# EAGLE board Board_file (EAGLE 9.7.0)
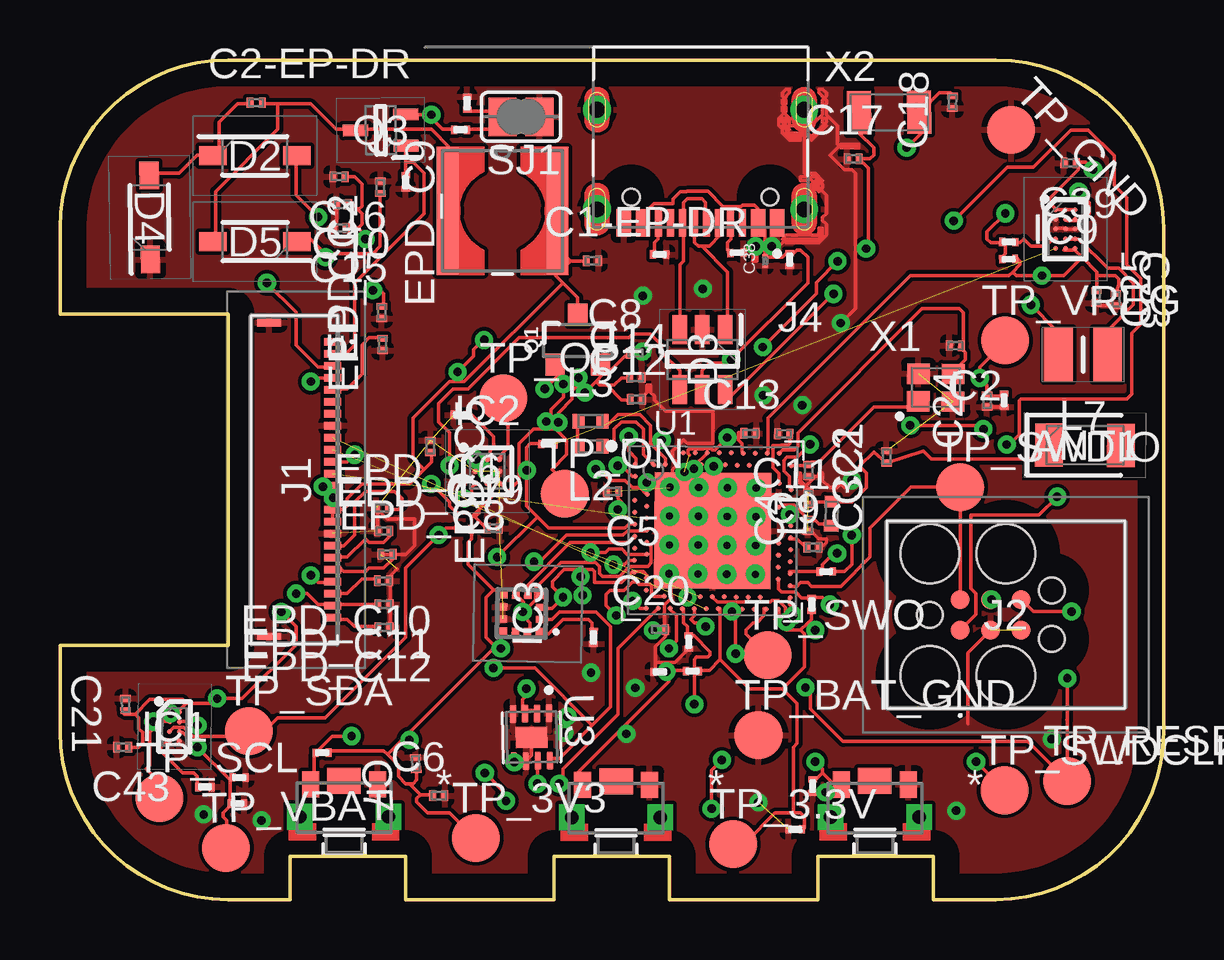
[diagram p0: board, top side]
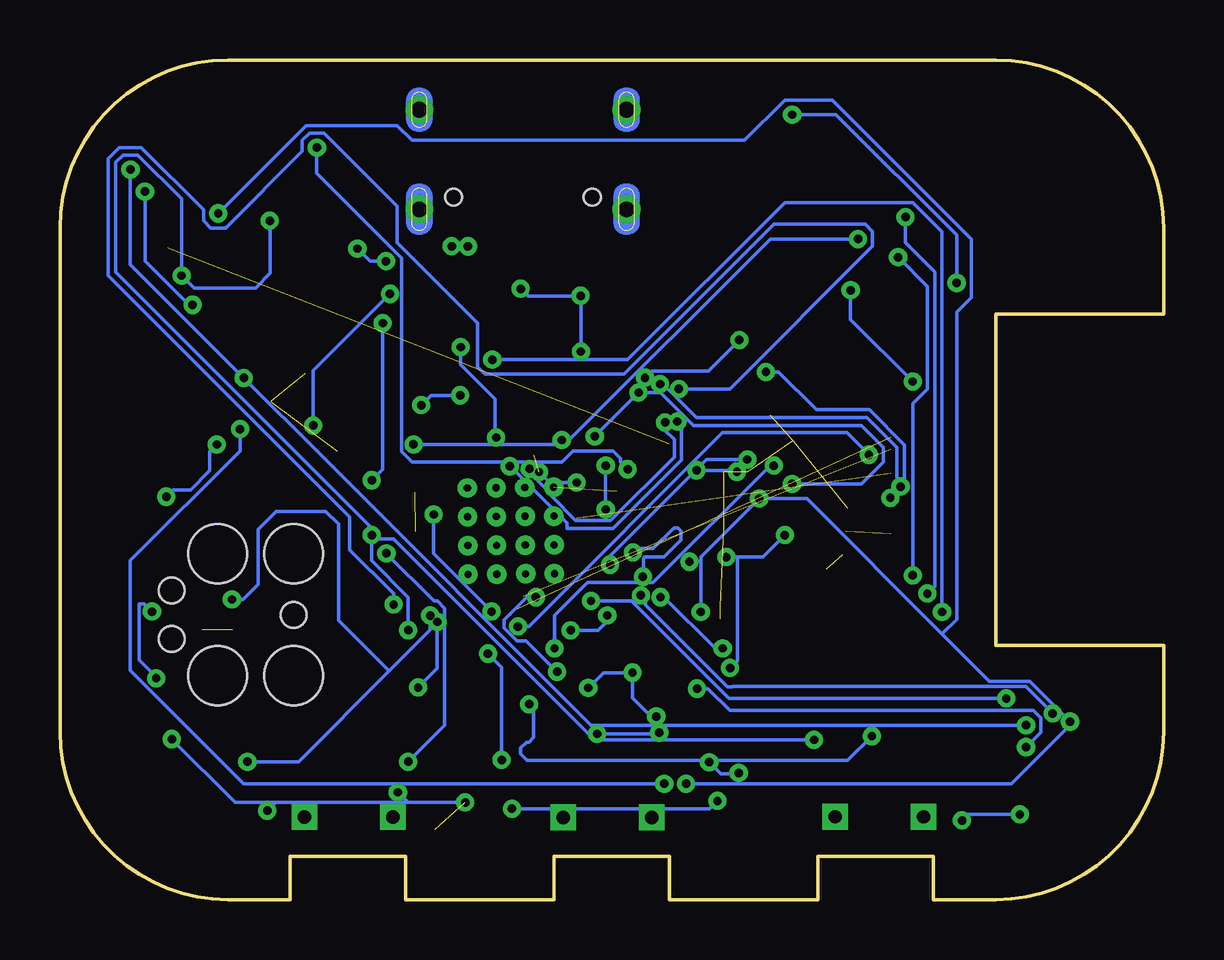
[diagram p1: board, bottom side, seen from below]

Size 46 x 35 mm. Coordinates in mm from the lower left corner, seen from the top.
Outline: 39,0 36.4,0 36.4,1.8 31.6,1.8 31.6,0 25.4,0 25.4,1.8 20.6,1.8 20.6,0 14.4,0 14.4,1.8 9.6,1.8 9.6,0 7,0 arc-90 0,7 0,10.6 7,10.6 7,24.4 0,24.4 0,28 arc-90 7,35 39,35 arc-90 46,28 46,7 arc-90 39,0
Copper layers (1*16): Top 0.035mm / dielectric 1.5mm / Bottom 0.035mm
Design rules "Fusion Electronics Design Rules *": minimum track width 6mil, minimum drill 0.35mm, track to track 6mil, track to pad 6mil, pad to pad 6mil, via to via 6mil, smd to smd 6mil, copper to edge 40mil, drill to drill 6mil, minimum pad ring 10mil, minimum via ring 8mil, stop-mask expansion 4mil, vias tented up to drill 9999mil, thermal gap 10mil
tRestrict: area 40.1,17.5 to 45.3,20.3
bRestrict: area 40.1,17.3 to 45.3,20.7

## Footprints (pad centres in the part's own frame; a part is rotated, then mirrored left to right if it is on the bottom)
2450AT18B100E_ANTC3216X140N = smd 1.15 x 1.8: 1 -1.5,0; 2 1.5,0
NORDIC_NRF_3_RESC0201_L = smd 0.28 x 0.43: 1 -0.255,0; 2 0.255,0
GRM011R60J152KE01L_1_0201 = smd 0.35 x 0.25: 1 0,0.275; 2 0,-0.275
GRM011R60J152KE01L_2_CAPC0201X13N = smd 0.22 x 0.23: 1 -0.185,0; 2 0.185,0
ESP32_C6_LIBRARY_5_SOD3716X135N = smd 1.15 x 0.8: 1 -1.75,0; 2 1.75,0
ESP32_C6_LIBRARY_3_SOT95P280X145-6N = smd 1.2 x 0.6: 1 -1.25,0.95; 2 -1.25,0; 3 -1.25,-0.95; 4 1.25,-0.95; 5 1.25,0; 6 1.25,0.95
BQ25180YBGR_BGA8C40P2X4_100X155X50 = smd 0.2 x 0.2: A1 -0.2,0.6; A2 0.2,0.6; B1 -0.2,0.2; B2 0.2,0.2; C1 -0.2,-0.2; C2 0.2,-0.2; D1 -0.2,-0.6; D2 0.2,-0.6
DRV2605YZFR_BGA9C50P3X3_144X144X62 = smd 0.25 x 0.25: A1 -0.5,0.5; A2 0,0.5; A3 0.5,0.5; B1 -0.5,0; B2 0,0; B3 0.5,0; C1 -0.5,-0.5; C2 0,-0.5; C3 0.5,-0.5
BMA423_BMA423 = smd 0.3 x 0.35: 1 -0.75,-0.775; 2 -0.25,-0.775; 3 0.25,-0.775; 4 0.75,-0.775; 7 0.75,0.775; 8 0.25,0.775; 9 -0.25,0.775; 10 -0.75,0.775 | smd 0.35 x 0.3: 5 0.775,-0.25; 6 0.775,0.25; 11 -0.775,0.25; 12 -0.775,-0.25
RT6160AWSC_BGA15C40P3X5_140X230X60 = smd 0.216 x 0.216: A1 -0.4,0.8; A2 0,0.8; A3 0.4,0.8; B1 -0.4,0.4; B2 0,0.4; B3 0.4,0.4; C1 -0.4,0; C2 0,0; C3 0.4,0; D1 -0.4,-0.4; D2 0,-0.4; D3 0.4,-0.4; E1 -0.4,-0.8; E2 0,-0.8; E3 0.4,-0.8
503480-2400_5034802400 = smd 0.3 x 0.7: 1 -5.75,1.525; 2 -5.25,1.525; 3 -4.75,1.525; 4 -4.25,1.525; 5 -3.75,1.525; 6 -3.25,1.525; 7 -2.75,1.525; 8 -2.25,1.525; 9 -1.75,1.525; 10 -1.25,1.525; 11 -0.75,1.525; 12 -0.25,1.525; 13 0.25,1.525; 14 0.75,1.525; 15 1.25,1.525; 16 1.75,1.525; 17 2.25,1.525; 18 2.75,1.525; 19 3.25,1.525; 20 3.75,1.525; 21 4.25,1.525; 22 4.75,1.525; 23 5.25,1.525; 24 5.75,1.525 | smd 0.3 x 1: MP1 -6.54,-1.125; MP2 6.54,-1.125
TC2030-IDC_TC2030IDC = smd 0.783 x 0.783: 1 -0.953,-0.635; 2 -0.953,0.635; 3 0.317,-0.635; 4 0.317,0.635; 5 1.588,-0.635; 6 1.588,0.635 | hole 2.451: -2.223,-2.54; -2.223,2.54; 0.952,-2.54; 0.952,2.54 | hole 1.067: -2.223,0; 2.857,-1.016; 2.857,1.016
KH-TYPE-C-16P_KINGHELM_KH-TYPE-C-16P = smd 0.6 x 1.15: A1_B12 -3.2,4.725; A4_B9 -2.4,4.725; A9_B4 2.4,4.725; A12_B1 3.2,4.725 | smd 0.3 x 1.15: A5 -1.25,4.725; A6 -0.25,4.725; A7 0.25,4.725; A8 1.25,4.725; B5 1.75,4.725; B6 0.75,4.725; B7 -0.75,4.725; B8 -1.75,4.725 | drill 0.65 pad 1.05: SH1 -4.32,0; SH2 4.32,0; SH3 -4.32,4.15; SH4 4.32,4.15 | hole 0.7: -2.89,3.65; 2.89,3.65
NORDIC_NRF_2_RESC0402_L = smd 0.5 x 0.6: 1 -0.5,0; 2 0.5,0
ESP32_C6_LIBRARY_2_IND_4828-WE-TPC_WRE = smd 0.9 x 5.3: 1 -2.286,0; 2 2.286,0
MLP2016SR47MT0S1_INDC2016X100N = smd 1.2 x 2.2: 1 -1.028,0; 2 1.028,0
ESP32_C6_LIBRARY_4_ESP32_C6_LIBRARY_4_ESP32_C6_LIBRARY_4_ESP32_C6_LIBRARY_4_ESP32_WROVER_SPARKFUN-DISCRETESEMI_SOT23-3 = smd 0.8 x 0.9: 1 -0.95,-1; 2 0.95,-1; 3 0,1.1
ESP32_C6_LIBRARY_6_SOT65P210X110-3N = smd 1.05 x 0.5: 1 -1.05,0.65; 2 -1.05,-0.65; 3 1.05,0
CPF0201D7K68C1_0201 = smd 0.35 x 0.25: 1 0,0.275; 2 0,-0.275
ESP32_C6_LIBRARY_7_JUMPER_SJ = smd 1.168 x 1.6: 1 -0.762,0; 2 0.762,0
2025-10-22_07-23-44_LIBRARY_SW_EVP-AKE31A_PAN = smd 0.711 x 1.092: 1 -1.4,-0.972; 2 1.4,-0.972 | drill 0.559 pad 0.914 square: 3 -1.848,0.381; 4 1.848,0.381 | smd 1.397 x 1.092: 5 0,-1.124
HECTOR_WATCH_1_TP20R = smd 2 x 2: TP 0,0
NORDIC_NRF_4_AQFN50P700X700X85_HS-74N = smd 4.85 x 4.85: P$74 0,0 | drill 0.3 pad 0.6: P$75 -1.8,1.8; P$76 -0.6,1.8; P$77 0.6,1.8; P$78 1.8,1.8; P$79 -1.8,0.6; P$80 -0.6,0.6; P$81 0.6,0.6; P$82 1.8,0.6; P$83 -1.8,-0.6; P$84 -0.6,-0.6; P$85 0.6,-0.6; P$86 1.8,-0.6; P$87 -1.8,-1.8; P$88 -0.6,-1.8; P$89 0.6,-1.8; P$90 1.8,-1.8 | smd 0.2 x 0.2: P$A8 -1.25,3.25; P$A10 -0.75,3.25; P$A12 -0.25,3.25; P$A14 0.25,3.25; P$A16 0.75,3.25; P$A18 1.25,3.25; P$A20 1.75,3.25; P$A22 2.25,3.25; P$A23 2.75,3.25; P$AA24 3.25,-2.25; P$AB2 -2.75,-2.5; P$AC5 -2,-2.75; P$AC9 -1,-2.75; P$AC11 -0.5,-2.75; P$AC13 0,-2.75; P$AC15 0.5,-2.75; P$AC17 1,-2.75; P$AC19 1.5,-2.75; P$AC21 2,-2.75; P$AC24 3.25,-2.75; P$AD2 -2.75,-3.25; P$AD4 -2.25,-3.25; P$AD6 -1.75,-3.25; P$AD8 -1.25,-3.25; P$AD10 -0.75,-3.25; P$AD12 -0.25,-3.25; P$AD14 0.25,-3.25; P$AD16 0.75,-3.25; P$AD18 1.25,-3.25; P$AD20 1.75,-3.25; P$AD22 2.25,-3.25; P$AD23 2.75,-3.25; P$B1 -3.25,2.75; P$B3 -2.5,2.75; P$B5 -2,2.75; P$B7 -1.5,2.75; P$B9 -1,2.75; P$B11 -0.5,2.75; P$B13 0,2.75; P$B15 0.5,2.75; P$B17 1,2.75; P$B19 1.5,2.75; P$B24 3.25,2.75; P$C1 -3.25,2.25; P$D2 -2.75,2; P$D23 2.75,2; P$E24 3.25,1.75; P$F2 -2.75,1.5; P$F23 2.75,1.5; P$G1 -3.25,1.25; P$H2 -2.75,1; P$H23 2.75,1; P$J1 -3.25,0.75; P$J24 3.25,0.75; P$K2 -2.75,0.5; P$L1 -3.25,0.25; P$L24 3.25,0.25; P$M2 -2.75,0; P$N1 -3.25,-0.25; P$N24 3.25,-0.25; P$P2 -2.75,-0.5; P$P23 2.75,-0.5; P$R1 -3.25,-0.75; P$R24 3.25,-0.75; P$T2 -2.75,-1; P$T23 2.75,-1; P$U1 -3.25,-1.25; P$U24 3.25,-1.25; P$V23 2.75,-1.5; P$W1 -3.25,-1.75; P$W24 3.25,-1.75; P$Y2 -2.75,-2; P$Y23 2.75,-2
ESP32_C6_LIBRARY_SON50P200X200X80-9N = smd 0.76 x 0.27: 1 -0.985,0.75; 2 -0.985,0.25; 3 -0.985,-0.25; 4 -0.985,-0.75; 5 0.985,-0.75; 6 0.985,-0.25; 7 0.985,0.25; 8 0.985,0.75 | smd 0.9 x 1.3: 9 0,0
NORDIC_NRF_BT-XTAL_2016_N = smd 0.95 x 0.85: 1 -0.725,-0.575; 2 0.725,-0.575; 3 0.725,0.575; 4 -0.725,0.575
NORDIC_NRF_1_XTAL_3215_N = smd 1 x 1.8: 1 -1.25,0; 2 1.25,0

## Placement (x,y rotation side)
ANT1  2450AT18B100E  [2450AT18B100E_ANTC3216X140N]  42.72,18.94 359.7 top
C1  12pF  [NORDIC_NRF_3_RESC0201_L]  31.21,17.88 270 top
C1-EP-DR  10uF  [NORDIC_NRF_3_RESC0201_L]  22.2,26.63 0 top
C2  12pF  [NORDIC_NRF_3_RESC0201_L]  37.32,23.09 178.9 top
C2-EP-DR  4.7uF/25V  [NORDIC_NRF_3_RESC0201_L]  8.18,33.22 0 top
C3  1pF  [NORDIC_NRF_3_RESC0201_L]  31.19,15.6 270 top
C4  1pF  [NORDIC_NRF_3_RESC0201_L]  31.2,16.72 90 top
C5  100nF  [NORDIC_NRF_3_RESC0201_L]  23.03,17.01 180 top
C6  4.7µF  [NORDIC_NRF_3_RESC0201_L]  15.79,4.33 0 top
C7  100nF  [NORDIC_NRF_3_RESC0201_L]  14.83,5.67 93.1 top
C8  100nF  [NORDIC_NRF_3_RESC0201_L]  23.99,22.78 0 top
C9  820pF  [NORDIC_NRF_3_RESC0201_L]  31.39,14.69 0 top
C10  N.C.  [NORDIC_NRF_3_RESC0201_L]  11.78,28.98 180 top
C11  100pF  [NORDIC_NRF_3_RESC0201_L]  30.17,19.41 178.5 top
C12  100nF  [NORDIC_NRF_3_RESC0201_L]  24.03,20.85 0 top
C13  N.C.  [NORDIC_NRF_3_RESC0201_L]  28.77,19.43 0 top
C14  4.7µF  [NORDIC_NRF_3_RESC0201_L]  24.01,21.76 359.1 top
C15  1.0µF  [NORDIC_NRF_3_RESC0201_L]  11.67,27.99 180 top
C16  47nF  [NORDIC_NRF_3_RESC0201_L]  11.63,30.13 180 top
C17  12pF  [NORDIC_NRF_3_RESC0201_L]  33.06,30.87 0 top
C18  12pF  [NORDIC_NRF_3_RESC0201_L]  37.2,33.24 88.7 top
C19  100nF  [NORDIC_NRF_3_RESC0201_L]  18.06,15.48 0 top
C20  4.7µF  [NORDIC_NRF_3_RESC0201_L]  24.99,11.25 0 top
C21  4.7µF  [NORDIC_NRF_3_RESC0201_L]  2.73,8.13 90.5 top
C22  N.C.  [NORDIC_NRF_3_RESC0201_L]  34.45,18.45 90 top
C23  0.1uF  [GRM011R60J152KE01L_1_0201]  39.35,20.81 180 top
C24  10uF  [NORDIC_NRF_3_RESC0201_L]  38.64,20.79 90 top
C25  22uF  [NORDIC_NRF_3_RESC0201_L]  43.2,25.12 270 top
C27  0.1uF  [GRM011R60J152KE01L_1_0201]  7.47,5.09 269 top
C29  1uF  [GRM011R60J152KE01L_1_0201]  31.38,4.73 180 top
C30  1uF  [GRM011R60J152KE01L_1_0201]  26.21,10.73 179.6 top
C31  1uF  [GRM011R60J152KE01L_1_0201]  25.01,9.49 90 top
C32  1uF  [GRM011R60J152KE01L_1_0201]  16.68,20.2 89.3 top
C33  22uF  [NORDIC_NRF_3_RESC0201_L]  44.01,25.01 270.9 top
C34  0.1uF  [GRM011R60J152KE01L_1_0201]  30.65,2.93 90.2 top
C37  1uF  [GRM011R60J152KE01L_1_0201]  7.4,4 270.1 top
C38  1uF  [GRM011R60J152KE01L_2_CAPC0201X13N]  29.39,26.61 89.5 top
C39  10uF  [NORDIC_NRF_3_RESC0201_L]  42.1,30.7 178.9 top
C42  0.1uF  [GRM011R60J152KE01L_1_0201]  30.42,26.67 0 top
C43  4.7uF  [NORDIC_NRF_3_RESC0201_L]  2.61,6.36 180 top
D2  MBR0530  [ESP32_C6_LIBRARY_5_SOD3716X135N]  8.12,31 0 top
D3  USBLC6-2SC6Y  [ESP32_C6_LIBRARY_3_SOT95P280X145-6N]  26.78,22.51 270 top
D4  MBR0530  [ESP32_C6_LIBRARY_5_SOD3716X135N]  3.74,28.43 90.8 top
D5  MBR0530  [ESP32_C6_LIBRARY_5_SOD3716X135N]  8.13,27.43 180 top
EPD_C1  1uF/50V  [NORDIC_NRF_3_RESC0201_L]  13.45,23.14 90 top
EPD_C2  1uF/50V  [NORDIC_NRF_3_RESC0201_L]  13.41,24.48 90 top
EPD_C5  0.1uF/50V  [NORDIC_NRF_3_RESC0201_L]  15.44,18.89 270 top
EPD_C6  1uF/50V  [NORDIC_NRF_3_RESC0201_L]  13.43,16.32 0 top
EPD_C7  1uF/50V  [NORDIC_NRF_3_RESC0201_L]  13.49,15.36 0 top
EPD_C8  1uF/50V  [NORDIC_NRF_3_RESC0201_L]  13.63,14.4 0 top
EPD_C9  1uF/50V  [NORDIC_NRF_3_RESC0201_L]  13.36,29.69 270 top
EPD_C10  1uF/50V  [NORDIC_NRF_3_RESC0201_L]  13.49,13.29 180 top
EPD_C11  1uF/50V  [NORDIC_NRF_3_RESC0201_L]  13.5,12.3 180 top
EPD_C12  1uF/50V  [NORDIC_NRF_3_RESC0201_L]  13.51,11.34 180 top
IC1  BQ25180YBGR  [BQ25180YBGR_BGA8C40P2X4_100X155X50]  4.77,7.21 359.6 top
IC2  DRV2605YZFR  [DRV2605YZFR_BGA9C50P3X3_144X144X62]  17.82,17.85 0 top
IC3  BMA421  [BMA423_BMA423]  19.24,11.93 89.1 top
IC9  RT6160AWSC  [RT6160AWSC_BGA15C40P3X5_140X230X60]  41.91,27.95 0 top
J1  503480-2400  [503480-2400_5034802400]  9.84,17.5 270 top
J2  TC2030-IDC  [TC2030-IDC_TC2030IDC]  38.48,11.87 0 top
J4  KH-TYPE-C-16P  [KH-TYPE-C-16P_KINGHELM_KH-TYPE-C-16P]  26.7,32.93 180 top
L1  3.9nH  [NORDIC_NRF_2_RESC0402_L]  32.16,16.08 88.6 top
L2  10µH  [NORDIC_NRF_2_RESC0402_L]  22.11,18.89 181 top
L3  15nH  [NORDIC_NRF_2_RESC0402_L]  22.11,19.94 0 top
L5  68uH  [ESP32_C6_LIBRARY_2_IND_4828-WE-TPC_WRE]  18.44,28.71 0 top
L7  FTC252012SR47MBCA  [MLP2016SR47MT0S1_INDC2016X100N]  42.64,22.72 0 top
Q1  20V/4.2A/52mΩ/1.4W  [ESP32_C6_LIBRARY_4_ESP32_C6_LIBRARY_4_ESP32_C6_LIBRARY_4_ESP32_C6_LIBRARY_4_ESP32_WROVER_SPARKFUN-DISCRETESEMI_SOT23-3]  21.59,23.3 0 top
Q3  SI1308EDL-T1-GE3  [ESP32_C6_LIBRARY_6_SOT65P210X110-3N]  13.37,32.07 180.6 top
R1_EP_DR  0.47  [CPF0201D7K68C1_0201]  16.7,32.09 270 top
R1_USB  5K1  [CPF0201D7K68C1_0201]  28.22,26.96 272.7 top
R2  0  [CPF0201D7K68C1_0201]  20.34,18.99 88.5 top
R2_EP_DR  10K  [CPF0201D7K68C1_0201]  14.41,29.91 180 top
R2_USB  5K1  [CPF0201D7K68C1_0201]  25,26.89 89.2 top
R3  0  [CPF0201D7K68C1_0201]  22.24,10.93 179.5 top
R4  0  [CPF0201D7K68C1_0201]  39.55,27.41 89.2 top
R5  10k  [CPF0201D7K68C1_0201]  10.92,6.12 90.8 top
R7  10k  [CPF0201D7K68C1_0201]  31.94,13.67 90.2 top
R8  10k  [CPF0201D7K68C1_0201]  26.37,9.52 90 top
R9  10K  [CPF0201D7K68C1_0201]  6.04,4.7 270 top
R17  3K3  [CPF0201D7K68C1_0201]  39.54,26.7 271.8 top
R18  3K3  [CPF0201D7K68C1_0201]  16.85,15.44 269.5 top
R_PWR_EPD  10K  [CPF0201D7K68C1_0201]  31.34,12.3 0 top
R_TYPE_SEL  2.2  [CPF0201D7K68C1_0201]  16.97,33.19 0 top
SJ1  [ESP32_C6_LIBRARY_7_JUMPER_SJ]  19.22,32.63 180 top
SW_DN  2025-10-22_07-23-44_LIBRARY_EVP-AKE31ASW_EVP-AKE31A_PAN  [2025-10-22_07-23-44_LIBRARY_SW_EVP-AKE31A_PAN]  33.97,3.82 180 top
SW_ENT  2025-10-22_07-23-44_LIBRARY_EVP-AKE31ASW_EVP-AKE31A_PAN  [2025-10-22_07-23-44_LIBRARY_SW_EVP-AKE31A_PAN]  23.18,3.81 180 top
SW_UP  2025-10-22_07-23-44_LIBRARY_EVP-AKE31ASW_EVP-AKE31A_PAN  [2025-10-22_07-23-44_LIBRARY_SW_EVP-AKE31A_PAN]  11.84,3.83 180 top
TP_3.3V  HECTOR_WATCH_1_TPTP20R  [HECTOR_WATCH_1_TP20R]  28.05,2.31 0 top
TP_3V3  HECTOR_WATCH_1_TPTP20R  [HECTOR_WATCH_1_TP20R]  17.34,2.57 0 top
TP_BAT_GND  HECTOR_WATCH_1_TPTP20R  [HECTOR_WATCH_1_TP20R]  29.12,6.85 0 top
TP_GND  HECTOR_WATCH_1_TPTP20R  [HECTOR_WATCH_1_TP20R]  39.65,32.09 312.8 top
TP_ON  HECTOR_WATCH_1_TPTP20R  [HECTOR_WATCH_1_TP20R]  21.04,16.92 0 top
TP_OP  HECTOR_WATCH_1_TPTP20R  [HECTOR_WATCH_1_TP20R]  18.49,20.9 0 top
TP_RESET  HECTOR_WATCH_1_TPTP20R  [HECTOR_WATCH_1_TP20R]  41.98,4.94 0 top
TP_SCL  HECTOR_WATCH_1_TPTP20R  [HECTOR_WATCH_1_TP20R]  4.15,4.24 0 top
TP_SDA  HECTOR_WATCH_1_TPTP20R  [HECTOR_WATCH_1_TP20R]  7.88,7.03 0 top
TP_SWDCLK  HECTOR_WATCH_1_TPTP20R  [HECTOR_WATCH_1_TP20R]  39.37,4.55 0 top
TP_SWDIO  HECTOR_WATCH_1_TPTP20R  [HECTOR_WATCH_1_TP20R]  37.53,17.19 0 top
TP_SWO  HECTOR_WATCH_1_TPTP20R  [HECTOR_WATCH_1_TP20R]  29.5,10.19 0 top
TP_VBAT  HECTOR_WATCH_1_TPTP20R  [HECTOR_WATCH_1_TP20R]  6.92,2.15 0.9 top
TP_VREG  HECTOR_WATCH_1_TPTP20R  [HECTOR_WATCH_1_TP20R]  39.4,23.3 0 top
U1  NRF52840_QF  [NORDIC_NRF_4_AQFN50P700X700X85_HS-74N]  27.21,15.37 359.5 top
U3  MAX17048G+T10  [ESP32_C6_LIBRARY_SON50P200X200X80-9N]  19.66,6.77 271.1 top
X1  32MHz  [NORDIC_NRF_BT-XTAL_2016_N]  36.51,21.34 359.6 top
X2  32.768kHz  [NORDIC_NRF_1_XTAL_3215_N]  34.56,32.82 0.5 top

## Library data of the parts
ANT1 = InkTime_v5; ARROW_PART_NUMBER: 2450AT18B100E; ARROW_PRICE-STOCK: https://www.arrow.com/en/products/2450at18b100e/johanson-dielectrics?utm_currency=USD&region=nac; DESCRIPTION: Antennas 2.45GHz ANTENNA; HEIGHT: 1.4mm; MANUFACTURER_NAME: JOHANSON TECHNOLOGY; MANUFACTURER_PART_NUMBER: 2450AT18B100E; MOUSER_PART_NUMBER: 609-2450AT18B100E; MOUSER_PRICE-STOCK: https://www.mouser.co.uk/ProductDetail/Johanson-Technology/2450AT18B100E?qs=yCnrNFeXz%252Bh5MFsFIXGZGA%3D%3D
C1 C1-EP-DR C2 C2-EP-DR C3-C8 C10-C25 C27 C29-C34 C37 C39 C42 C43 EPD_C1 EPD_C2 EPD_C5-EPD_C12 L1-L3 R1_EP_DR R1_USB R2 R2_EP_DR R2_USB R3-R5 R7-R9 R17 R18 R_PWR_EPD R_TYPE_SEL SJ1 TP_3.3V TP_3V3 TP_BAT_GND TP_GND TP_ON TP_OP TP_RESET TP_SCL TP_SDA TP_SWDCLK TP_SWDIO TP_SWO TP_VBAT TP_VREG U1 X1 X2 = InkTime_v5
C9 = InkTime_v5; STATUS: N.C.
C38 = InkTime_v5; AVAILABILITY: In Stock; CHECK_PRICES: https://www.snapeda.com/parts/GRM011R60J152KE01L/Murata/view-part/?ref=eda; DESCRIPTION: SMD Capacitor X5R(EIA) with Capacitance: 1500pF Tol. 10%. Rated Voltage: 6.3Vdc; MF: Murata; MP: GRM011R60J152KE01L; PACKAGE: 0201 Murata; PRICE: None; SNAPEDA_LINK: https://www.snapeda.com/parts/GRM011R60J152KE01L/Murata/view-part/?ref=snap
D2 D4 D5 = InkTime_v5; AVAILABILITY: In Stock; CHECK_PRICES: https://www.snapeda.com/parts/MBR0530/Onsemi/view-part/?ref=eda; DESCRIPTION: Diode Schottky 30 V 500mA Surface Mount SOD-123; MF: ON Semiconductor; MP: MBR0530; PACKAGE: SOD-123-2 ON Semiconductor; PRICE: None; PURCHASE-URL: https://www.snapeda.com/api/url_track_click_mouser/?unipart_id=179458&manufacturer=ON Semiconductor&part_name=MBR0530&search_term=None; SNAPEDA_LINK: https://www.snapeda.com/parts/MBR0530/Onsemi/view-part/?ref=snap
D3 = InkTime_v5; AVAILABILITY: In Stock; CHECK_PRICES: https://www.snapeda.com/parts/USBLC6-2SC6Y/STMicroelectronics/view-part/?ref=eda; DESCRIPTION: 17V Clamp 5A (8/20µs) Ipp Tvs Diode Surface Mount SOT-23-6; MF: STMicroelectronics; MP: USBLC6-2SC6Y; PACKAGE: SOT-23-6 STMicroelectronics; PRICE: None; SNAPEDA_LINK: https://www.snapeda.com/parts/USBLC6-2SC6Y/STMicroelectronics/view-part/?ref=snap
IC1 = InkTime_v5; ARROW_PART_NUMBER: BQ25180YBGR; ARROW_PRICE-STOCK: https://www.arrow.com/en/products/bq25180ybgr/texas-instruments?utm_currency=USD&region=nac; DESCRIPTION: Charger IC Lithium Ion/Polymer, Lithium Iron Phosphate 8-DSBGA (1.6x1.1); HEIGHT: 0.5mm; MANUFACTURER_NAME: Texas Instruments; MANUFACTURER_PART_NUMBER: BQ25180YBGR; MOUSER_PART_NUMBER: 595-BQ25180YBGR; MOUSER_PRICE-STOCK: https://www.mouser.co.uk/ProductDetail/Texas-Instruments/BQ25180YBGR?qs=doiCPypUmgEWjAK%252BJAX6Tw%3D%3D
IC2 = InkTime_v5; ARROW_PART_NUMBER: DRV2605YZFR; ARROW_PRICE-STOCK: https://www.arrow.com/en/products/drv2605yzfr/texas-instruments?region=nac; DESCRIPTION: Haptic Driver for ERM/LRA with Built-In Library and Smart Loop Architecture; HEIGHT: 0.625mm; MANUFACTURER_NAME: Texas Instruments; MANUFACTURER_PART_NUMBER: DRV2605YZFR
IC3 = InkTime_v5; ARROW_PART_NUMBER: BMA423; ARROW_PRICE-STOCK: https://www.arrow.com/en/products/bma423/bosch; DESCRIPTION: Accelerometers Triaxial low-g 12bit Acceleration Sensor; HEIGHT: 1mm; MANUFACTURER_NAME: BOSCH; MANUFACTURER_PART_NUMBER: BMA423; MOUSER_PART_NUMBER: 262-BMA423; MOUSER_PRICE-STOCK: https://www.mouser.co.uk/ProductDetail/Bosch-Sensortec/BMA423?qs=HXFqYaX1Q2xC%252BSgeGoX3mg%3D%3D
IC9 = InkTime_v5; DESCRIPTION: Buck-Boost Regulator Positive Output Step-Up/Step-Down I2C DC-DC Controller IC 15-WL-CSP (BSC) (1.4x2.3); HEIGHT: 0.6mm; MANUFACTURER_NAME: RICHTEK; MANUFACTURER_PART_NUMBER: RT6160AWSC; MOUSER_PART_NUMBER: 835-RT6160AWSC; MOUSER_PRICE-STOCK: https://www.mouser.co.uk/ProductDetail/Richtek/RT6160AWSC?qs=amGC7iS6iy%2FLd9PSoixZXQ%3D%3D
J1 = InkTime_v5; DESCRIPTION: FFC & FPC Connectors 0.5mm FPC RA SMT Dual Contact 24Ckt; HEIGHT: 1.87mm; MANUFACTURER_NAME: Molex; MANUFACTURER_PART_NUMBER: 503480-2400; MOUSER_PART_NUMBER: 538-503480-2400; MOUSER_PRICE-STOCK: https://www.mouser.co.uk/ProductDetail/Molex/503480-2400?qs=OAhjpuo3Vu7efIoxFh9AOw%3D%3D
J2 = InkTime_v5; DESCRIPTION: CABLE ADAPTER 6 POS; HEIGHT: 19mm; MANUFACTURER_NAME: Tag Connect; MANUFACTURER_PART_NUMBER: TC2030-IDC
J4 = InkTime_v5; AVAILABILITY: Not in stock; CHECK_PRICES: https://www.snapeda.com/parts/KH-TYPE-C-16P/Kinghelm/view-part/?ref=eda; MF: kinghelm; MP: KH-TYPE-C-16P; PACKAGE: None; PRICE: None; SNAPEDA_LINK: https://www.snapeda.com/parts/KH-TYPE-C-16P/Kinghelm/view-part/?ref=snap
L5 = InkTime_v5; COPYRIGHT: Copyright (C) 2024 Ultra Librarian. All rights reserved.; MANUFACTURER_PART_NUMBER: 744043680; MFR_NAME: Wurth Electronics
L7 = InkTime_v5; DESCRIPTION: SMD / SMT Inductors (Coils), L=0.47?H, L x W x T :; HEIGHT: 1mm; JLCPCB: https://jlcpcb.com/partdetail/6763488-FTC252012SR47MBCA/C5832368; MANUFACTURER_NAME: TDK; MANUFACTURER_PART_NUMBER: FTC252012SR47MBCA
Q1 = InkTime_v5; PROD_ID: TRAN-14388
Q3 = InkTime_v5; AVAILABILITY: In Stock; CHECK_PRICES: https://www.snapeda.com/parts/SI1308EDL-T1-GE3/Vishay+Siliconix/view-part/?ref=eda; DESCRIPTION: Si1308EDL-T1-GE3 N-channel MOSFET Transistor, 1.5 A, 30 V, 3-Pin SC-70 | Siliconix / Vishay SI1308EDL-T1-GE3; MF: Vishay Siliconix; MP: SI1308EDL-T1-GE3; PACKAGE: SOT-323 Vishay Semiconductor; PRICE: None; PURCHASE-URL: https://www.snapeda.com/api/url_track_click_mouser/?unipart_id=274603&manufacturer=Vishay Siliconix&part_name=SI1308EDL-T1-GE3&search_term=None; SNAPEDA_LINK: https://www.snapeda.com/parts/SI1308EDL-T1-GE3/Vishay+Siliconix/view-part/?ref=snap
SW_DN SW_ENT SW_UP = InkTime_v5; COPYRIGHT: Copyright (C) 2025 Ultra Librarian. All rights reserved.; DIGI-KEY_PART_NUMBER_1: P123437TR-ND; DIGI-KEY_PART_NUMBER_2: P123437CT-ND; DIGI-KEY_PART_NUMBER_3: P123437DKR-ND; MANUFACTURER_NAME: Panasonic; MANUFACTURER_PART_NUMBER: EVP-AKE31A
U3 = InkTime_v5; AVAILABILITY: In Stock; CHECK_PRICES: https://www.snapeda.com/parts/MAX17048G+T10/Analog+Devices/view-part/?ref=eda; DESCRIPTION: 3µA 1-Cell/2-Cell Fuel Gauge with ModelGauge; MF: Analog Devices; MP: MAX17048G+T10; PACKAGE: TDFN-8 Maxim; PRICE: None; PURCHASE-URL: https://www.snapeda.com/api/url_track_click_mouser/?unipart_id=329239&manufacturer=Analog Devices&part_name=MAX17048G+T10&search_term=None; SNAPEDA_LINK: https://www.snapeda.com/parts/MAX17048G+T10/Analog+Devices/view-part/?ref=snap

## Nets
3V3: C6.1 C7.1 C8.1 C12.1 C14.1 C19.1 C25.1 C33.1 C34.2 IC2.C2 IC3.3 IC3.7 IC3.10 IC9.E2 IC9.E3 J2.1 Q1.2 R5.2 R7.2 R8.2 R17.1 R18.1 R_PWR_EPD.2 TP_3.3V.TP TP_3V3.TP U1.P$A22 U1.P$AD14 U1.P$AD23 U1.P$B1 U1.P$W1 U1.P$Y2
ALERT: U1.P$J24 U3.5
D+: D3.4 U1.P$AD6
D-: D3.6 U1.P$AD4
DEC1: C5.1 U1.P$C1
DEC3: C11.1 U1.P$D23
DEC4_6: C10.1 C15.1 C16.1 L3.2 U1.P$B5 U1.P$E24
DN: D3.1 J4.A7 J4.B7
DP: D3.3 J4.A6 J4.B6
EPD_3V3: C1-EP-DR.1 EPD_C5.2 J1.15 J1.16 L5.2 Q1.3
EPD_BUSY: J1.9 U1.P$AD12
EPD_CS: J1.12 U1.P$K2
EPD_DC: J1.11 U1.P$AD10
EPD_RST: J1.10 U1.P$AC11
GDR: J1.2 Q3.1 R2_EP_DR.2
GND: C1-EP-DR.2 C1.2 C2.2 C3.2 C4.2 C5.2 C6.2 C7.2 C8.2 C9.2 C10.2 C11.2 C12.2 C13.2 C14.2 C15.2 C16.2 C17.1 C18.1 C19.2 C20.2 C21.2 C22.2 C23.1 C24.1 C25.2 C27.1 C29.1 C30.1 C31.1 C32.1 C33.2 C34.1 C37.1 C38.1 C39.2 C42.2 C43.2 D3.2 D4.1 EPD_C1.1 EPD_C2.1 EPD_C5.1 EPD_C6.1 EPD_C7.1 EPD_C8.1 EPD_C9.1 EPD_C10.1 EPD_C11.1 EPD_C12.1 IC1.D2 IC2.B1 IC2.B3 IC3.8 IC3.9 IC9.B1 IC9.C1 IC9.C2 IC9.C3 J1.8 J1.17 J1.MP1 J1.MP2 J2.3 J2.5 J4.A1_B12 J4.A12_B1 J4.SH1 J4.SH2 J4.SH3 J4.SH4 R1_USB.1 R2_EP_DR.1 R2_USB.2 R3.1 R9.1 R_TYPE_SEL.1 SJ1.1 SW_DN.1 SW_ENT.1 SW_UP.1 TP_BAT_GND.TP TP_GND.TP U1.P$74 U1.P$75 U1.P$76 U1.P$77 U1.P$78 U1.P$79 U1.P$80 U1.P$81 U1.P$82 U1.P$83 U1.P$84 U1.P$85 U1.P$86 U1.P$87 U1.P$88 U1.P$89 U1.P$90 U1.P$B7 U1.P$F23 U3.1 U3.4 U3.6 U3.9 X1.2 X1.4
HAPTIC_EN: IC2.A1 U1.P$U1
IMU_INT1: IC3.5 U1.P$N1
IMU_INT2: IC3.6 U1.P$P2
LX1: IC9.B2 IC9.B3 L7.1
LX2: IC9.D2 IC9.D3 L7.2
MOSI: J1.14 U1.P$B13
N$1: IC3.1 R3.2
N$2: IC1.D1 R9.2
N$3: IC9.D1 R4.2
N$4: IC9.E1 R2.2
N$5: R1_EP_DR.1 R_TYPE_SEL.2 SJ1.2
N$6: C20.1 U1.P$AC5
N$7: L2.1 U1.P$B3
N$8: L2.2 L3.1
N$9: C2-EP-DR.2 D5.2 L5.1 Q3.3
N$10: C2-EP-DR.1 D2.1 D4.2
N$11: EPD_C2.2 J1.4
N$12: EPD_C1.2 J1.5
N$13: J4.B5 R2_USB.1
N$14: C32.2 IC2.A2
N$15: EPD_C6.2 J1.18
N$16: EPD_C7.2 J1.19
N$17: EPD_C8.2 J1.20
N$19: C13.1 U1.P$A18
N$20: EPD_C10.2 J1.22
N$22: C9.1 U1.P$N24
N$23: C3.1 L1.1 U1.P$H23
N$24: C2.1 U1.P$A23 X1.3
N$25: C1.1 U1.P$B24 X1.1
N$26: EPD_C12.2 J1.24
N$28: J4.A5 R1_USB.2
OUT+: IC2.A3 TP_OP.TP
OUT-: IC2.C3 TP_ON.TP
P0.00/XL1: C17.2 U1.P$D2 X2.1
P0.01/XL2: C18.2 U1.P$F2 X2.2
P0.04: U1.P$J1
P0.09: U1.P$L24
P0.13: C30.2 R5.1 SW_UP.2 U1.P$AD8
P0.14: C31.2 R8.1 SW_ENT.2 U1.P$AC9
P0.19: U1.P$AC15
P0.20: U1.P$AD16
P0.21: U1.P$AC17
P0.22: U1.P$AD18
P0.23: U1.P$AC19
P0.24: U1.P$AD20
P0.25: U1.P$AC21
P0.26: U1.P$G1
P0.27: U1.P$H2
P0.28: U1.P$B11
P0.29: U1.P$A10
P0.30: U1.P$B9
P0.31: U1.P$A8
P1.01: Q1.1 R_PWR_EPD.1 U1.P$Y23
P1.02: C29.2 R7.1 SW_DN.2 U1.P$W24
P1.03: U1.P$V23
P1.04: U1.P$U24
P1.05: U1.P$T23
P1.06: U1.P$R24
P1.07: U1.P$P23
P1.09: U1.P$R1
P1.10: U1.P$A20
P1.11: U1.P$B19
P1.12: U1.P$B17
P1.13: U1.P$A16
P1.14: U1.P$B15
P1.15: U1.P$A14
PMIC_INT: IC1.A1 U1.P$T2
PREVGH: D5.1 EPD_C9.2 J1.21
PREVGL: D2.2 EPD_C11.2 J1.23
RESE: J1.3 Q3.2 R1_EP_DR.2
RESET: J2.6 TP_RESET.TP U1.P$AC13
RF: ANT1.1 C4.1 C22.1 L1.2
SCK: J1.13 U1.P$A12
SCL: IC1.B1 IC2.C1 IC3.12 R4.1 R17.2 TP_SCL.TP U1.P$M2 U3.7
SDA: IC1.C1 IC2.B2 IC3.2 R2.1 R18.2 TP_SDA.TP U1.P$L1 U3.8
SWDCLK: J2.4 TP_SWDCLK.TP U1.P$AC24
SWDIO: J2.2 TP_SWDIO.TP U1.P$AA24
SWO: TP_SWO.TP U1.P$AD22
VBAT: C27.2 C37.2 IC1.C2 TP_VBAT.TP U3.2 U3.3
VBUS: C21.1 C38.2 C42.1 C43.1 D3.5 IC1.A2 J4.A4_B9 J4.A9_B4 U1.P$AD2
VREG: C23.2 C24.2 C39.1 IC1.B2 IC9.A1 IC9.A2 IC9.A3 TP_VREG.TP

## Tracks (layer width: path | path; a pad name or v marks a point on that pad's centre or on a via)
3V3  (via drill 0.35)
  Top 0.152: 42.3,27.08 41.85,27.08 IC9.E2 | 42.61,26.77 43.22,26.16 43.22,26.01 | 42.61,26.77 42.3,27.08 | 43.22,26.01 43.22,25.4 C25.1 | 42.3,27.08 IC9.E3 | 43.22,26.01 43.98,26.01 44.13,25.86 44.13,25.64 C33.1 | 39.71,26.16 40.02,26.47 40.02,26.62 39.86,26.77 R17.1 | 39.71,26.16 39.56,26.01 35.45,26.01 29.5,20.07 29.5,18.7 U1.P$A22 | 42.61,26.77 41.85,26.01 v40.93,26.01 39.86,26.01 39.71,26.16 | 30.57,3.61 29.81,3.61 28.59,2.39 28.13,2.39 TP_3.3V.TP | 30.57,3.61 30.87,3.61 31.03,3.46 31.03,3 C34.2 | 27.52,10.01 27.52,12.14 U1.P$AD14 | 27.52,10.01 27.06,9.55 26.76,9.55 R8.2 | 30.87,11.23 30.26,11.23 29.81,11.69 29.96,11.84 29.96,12.14 U1.P$AD23 | 31.18,11.53 31.33,11.69 31.33,11.99 R_PWR_EPD.2 | 31.18,11.53 30.87,11.23 | v33.01,15.19 33.01,13.97 32.7,13.67 32.24,13.67 R7.2 | 31.18,11.53 v31.48,11.23 | 27.52,10.01 28.74,8.79 30.11,8.79 | 30.11,8.79 31.03,9.71 31.03,11.08 30.87,11.23 | 30.57,3.61 30.57,6.35 30.72,6.5 30.72,8.18 30.11,8.79 | 13.65,6.05 14.11,5.59 14.11,5.13 14.41,4.83 14.57,4.83 | 13.65,6.05 13.5,6.2 11.21,6.2 R5.2 | 14.57,4.83 14.72,4.83 14.87,4.98 14.87,5.29 C7.1 | 15.02,4.37 15.48,4.37 C6.1 | 14.57,4.83 15.02,4.37 | 15.02,4.37 14.87,4.22 14.87,4.07 15.33,3.61 16.24,3.61 16.7,3.15 16.85,3.15 17.31,2.69 TP_3V3.TP | v23.71,19.31 23.71,18.7 24.02,18.39 24.02,18.24 U1.P$B1 | 22.34,21.59 22.64,21.9 22.64,22.05 | 22.34,21.59 v21.88,21.14 | 22.64,22.05 22.64,22.2 Q1.2 22.64,22.05 | 22.8,21.44 22.49,21.44 22.34,21.59 | 22.8,21.44 23.1,21.44 23.41,21.74 23.71,21.74 C14.1 | 22.8,21.44 23.41,20.83 23.71,20.83 C12.1 | 22.64,22.05 22.95,22.05 23.56,22.66 23.71,22.66 C8.1 | U1.P$Y2 24.47,13.36 24.47,13.52 24.32,13.67 24.02,13.67 U1.P$W1 23.86,13.67 23.41,13.21 22.28,13.21 22.28,13.67 22.19,13.75 21.01,13.75 20.53,13.27 20.53,13.04 v20.97,12.6 20.51,12.14 20.05,12.14 IC3.3
  Top 0.152: 18.22,10.62 18.38,10.77 18.38,11.08 IC3.10 | 18.22,10.62 18.07,10.62 17.77,10.92 17.77,12.6 18.07,12.91 | 18.07,12.91 18.22,12.91 18.38,12.75 IC3.7 | 17.16,15.95 17.46,16.26 | 17.46,16.26 18.07,16.87 17.92,17.02 17.92,17.33 IC2.C2 | 17.16,15.95 17.16,15.5 R18.1 17.16,15.34 17.16,15.04 17,14.89 17,13.97 18.07,12.91 | 17.46,16.26 17.46,16.11 17.31,15.95 17.77,15.5 C19.1 | v15.48,17.33 16.24,16.56 16.24,16.41 16.55,16.11 17,16.11 17.16,15.95 | 18.22,10.62 14.41,6.81 | 14.41,6.81 13.65,6.05 | 18.22,10.62 v18.38,10.47 | 14.41,6.81 v14.57,6.66 | v37.26,28.3 39.48,30.52 40.58,30.52 42.14,32.08 42.86,32.08 43.94,31 43.94,29.78 44.47,29.25 44.47,26.47 45.05,25.89 45.05,24 44.67,23.62 44.67,21.07 44.46,20.85 40.04,20.85 39.98,20.79 39.98,19.39 39.56,18.97 v39.46,18.97 | v41.57,16.79 40.8,16.02 37.97,16.02 37.96,16.02 37.96,12.97 38.18,12.76 38.18,11.89 J2.1
  Bottom 0.152: 33.01,15.04 33.01,14.12 31.48,12.6 v31.48,11.23 | v23.71,19.31 v21.88,21.14 20.97,21.14 19.6,19.76 12.59,19.76 11.67,18.85 11.67,18.24 12.59,17.33 v15.48,17.33 | v20.97,12.6 20.81,12.6 18.68,10.47 v18.38,10.47 | 33.01,15.04 32.09,15.04 23.71,6.66 v14.57,6.66 | 33.01,15.04 v33.01,15.19 33.01,15.5 43.67,26.16 43.67,30.74 43.37,31.04 42.76,31.04 40.93,29.21 v40.93,26.01 40.41,25.49 37.85,25.49 37.23,26.11 37.23,27.89 37.26,27.91 v37.26,28.3 | v39.46,18.97 39.75,18.68 39.75,17.88 40.55,17.08 41.28,17.08 v41.57,16.79
ALERT  (via drill 0.35)
  Top 0.152: U3.5 v18.94,5.73 | v17.71,5.28 18.59,4.39 v18.59,4.11 | v27.16,3.78 27.16,5.39 v27.59,5.82 | v28.16,10.25 28.16,11.85 v28.01,12.01 | U1.P$J24 v30.42,16.05
  Bottom 0.152: v18.94,5.73 18.44,5.23 18.02,5.23 17.97,5.28 v17.71,5.28 | v18.59,4.11 18.92,3.78 v27.16,3.78 | v27.59,5.82 27.59,9.68 v28.16,10.25 | v28.01,12.01 30.42,14.42 v30.42,16.05
D+  (via drill 0.35)
  Top 0.152: v25.39,10.47 25.69,10.77 25.69,11.84 25.39,12.14 U1.P$AD6 | v16.24,18.09 16.24,19.46 15.79,19.92 15.79,20.68 16.4,21.29 17,21.29 19.14,23.42 23.71,23.42 23.86,23.57 24.62,23.57 25.08,23.12 25.08,22.81 25.84,22.05 25.84,21.29 D3.4
  Bottom 0.152: v25.39,10.47 25.39,11.84 24.02,13.21 21.27,13.21 16.4,18.09 v16.24,18.09
D-  (via drill 0.35)
  Top 0.152: v20.81,4.83 20.97,4.98 20.97,5.44 23.25,7.72 23.25,10.47 U1.P$AD4 | v38.49,19.61 38.34,19.76 v35.45,19.76 | v32.24,25.25 27.98,20.98 27.83,20.98 27.67,21.14 D3.6
  Bottom 0.152: v20.81,4.83 38.34,4.83 43.07,9.55 43.07,14.12 38.49,18.7 v38.49,19.61 | v35.45,19.76 35.45,22.05 v32.24,25.25
DEC1  (via drill 0.35)
  Top 0.152: v23.25,18.09 23.41,18.09 23.86,17.63 24.02,17.63 U1.P$C1 | v23.25,16.26 23.25,16.41 23.41,16.56 23.25,16.72 23.25,16.87 C5.1
  Bottom 0.152: v23.25,16.26 v23.25,18.09
DEC3
  Top 0.152: C11.1 30.43,19.01 30.39,18.98 29.73,18.93 29.73,18.01 29.97,17.76 U1.P$D23
DEC4_6  (via drill 0.35)
  Top 0.152: 12.43,27.99 11.98,27.99 C15.1 | 12.43,27.99 12.59,28.15 12.59,28.6 12.43,28.76 | 12.43,28.76 12.13,29.06 C10.1 | 12.43,28.76 12.59,28.91 12.59,29.82 12.28,30.13 11.98,30.13 C16.1 | 24.78,18.85 24.62,19 24.62,19.76 24.17,20.22 23.25,20.22 22.8,19.76 22.64,19.76 22.49,19.92 L3.2 | 24.78,18.85 25.23,18.39 25.23,18.09 U1.P$B5 | v31.26,18.97 30.73,18.44 30.31,18.44 30.18,18.31 30.18,17.86 30.42,17.63 30.42,17.17 U1.P$E24 | 24.78,18.85 v25.08,19.15 | 12.43,27.99 12.74,27.69 v12.74,27.54
  Bottom 0.152: v31.26,18.97 25.26,18.97 v25.08,19.15 24.78,19.15 16.4,27.54 v12.74,27.54
DN
  Top 0.152: 26.76,27.23 27.06,27.23 27.52,27.69 27.52,28.15 J4.B7 | 26.76,27.23 26.61,27.23 26.45,27.38 26.45,28.15 J4.A7 | 26.76,27.23 27.83,26.16 27.83,23.88 D3.1
DP
  Top 0.152: J4.A6 26.91,28.3 26.91,29.06 26.76,29.21 26.15,29.21 26,29.06 26,28.3 J4.B6 26,28.15 26,26.62 25.84,26.47 25.84,23.88 D3.3
EPD_3V3
  Top 0.152: 21.27,26.62 21.88,26.62 C1-EP-DR.1 | 21.27,26.62 20.81,27.08 20.81,28.6 L5.2 | 20.97,25.71 20.66,26.01 21.27,26.62 | 20.97,25.71 21.58,25.1 21.58,24.49 Q1.3 | 15.18,17.93 14.57,17.33 12.59,17.33 11.98,16.72 11.98,16.41 11.82,16.26 11.52,16.26 J1.15 11.37,16.11 11.37,15.8 J1.16 | 15.18,17.93 15.48,18.24 15.48,18.54 EPD_C5.2 | 20.97,25.71 16.85,21.59 16.24,21.59 14.72,20.07 14.72,18.39 15.18,17.93
EPD_BUSY  (1 unrouted)
EPD_CS  (1 unrouted)
EPD_DC  (via drill 0.35)
  Top 0.152: v26.91,11.38 26.76,11.53 26.45,11.53 26.3,11.69 26.45,11.84 26.45,12.14 U1.P$AD10 | v12.28,18.54 11.98,18.24 11.52,18.24 J1.11
  Bottom 0.152: v26.91,11.38 26.45,11.38 18.38,19.46 13.19,19.46 v12.28,18.54
EPD_RST  (1 unrouted)
GDR
  Top 0.152: 14.41,30.74 14.41,31.19 14.26,31.35 14.41,31.5 Q3.1 | 14.41,30.74 14.41,30.28 R2_EP_DR.2 | 14.41,30.74 14.72,30.74 15.18,30.28 15.18,28.6 12.28,25.71 12.28,23.12 11.98,22.81 11.52,22.81 J1.2
GND  (via drill 0.35)  (15 unrouted)
  Top 0.152: 29.04,17.02 29.2,16.87 29.96,16.87 U1.P$F23 | 29.04,17.02 29.04,16.11 U1.P$82 29.04,15.95 29.04,14.89 U1.P$74 | 29.04,17.02 U1.P$78 | U1.P$84 26.61,14.89 27.06,15.34 U1.P$74 | U1.P$89 27.83,13.67 27.83,14.73 U1.P$85 27.67,14.89 27.22,15.34 U1.P$74 | U1.P$83 25.54,14.89 26.45,14.89 U1.P$74 | 27.22,15.5 26.76,15.95 U1.P$80 | 27.22,15.5 27.67,15.95 U1.P$81 | 27.22,15.5 U1.P$74 | 25.39,17.17 25.39,16.11 U1.P$79 | 29.04,14.73 29.04,13.67 U1.P$90 | 29.04,14.73 U1.P$86 | 29.04,14.73 U1.P$74 | U1.P$76 26.61,17.17 26,16.56 U1.P$74 | U1.P$77 27.67,17.17 26.76,17.17 U1.P$74 | 25.39,17.17 U1.P$75 | 25.39,17.17 U1.P$74 | U1.P$74 26.61,14.73 26.61,13.67 U1.P$88 26.45,13.67 25.54,13.67 U1.P$87 25.47,13.51 25.47,12.56 25.19,12.28 25.19,11.31 C20.2 25.24,10.97 24.82,10.55 24.82,9.86 | 25.69,18.09 25.69,18.24 25.54,18.39 25.54,18.7 26,19.15 26.15,19 27.22,19 27.22,20.37 25.23,20.37 24.78,20.83 24.78,20.98 24.62,21.14 24.62,21.44 24.47,21.44 24.47,21.14 24.32,20.98 C12.2 | IC9.C1 41.54,27.99 41.85,27.99 IC9.C2 IC9.C3 | C3.2 31.33,15.34 31.64,15.04 31.94,15.04 31.94,14.89 31.79,14.73 C9.2 | 25.69,18.09 25.54,17.93 25.54,17.33 U1.P$74 | 25.69,18.09 U1.P$B7 | 28.97,27.16 29.04,27.08 29.04,26.62 28.89,26.62 28.89,27.08 | 28.97,27.16 28.89,27.23 28.74,27.23 28.59,27.08 R1_USB.1 | v32.55,24.03 33.16,24.64 33.16,30.28 33.01,30.43 32.7,30.43 32.09,31.04 32.55,31.5 33.31,31.5 33.31,31.35 32.55,31.35 32.4,31.5 32.4,32.26 31.94,32.72 31.94,33.02 31.79,33.17 31.79,33.33 31.94,33.48 31.94,33.63 31.79,33.78 31.64,33.78 31.64,33.63 31.94,33.33 31.94,33.17 31.79,33.02 31.79,32.72 31.18,32.11 31.18,31.96 31.33,31.8 31.94,32.41 31.94,32.57 31.79,32.57 31.79,32.41 31.94,32.26 31.33,31.65 30.72,32.26 30.42,32.26 30.42,32.57 30.11,32.87 30.11,33.02 30.26,33.17 30.26,33.33 30.11,33.48 30.11,33.63 30.26,33.78 30.42,33.78 30.42,33.63 30.11,33.33 30.11,33.17 30.26,33.02 30.26,32.87 29.96,32.57 29.96,32.26 30.11,32.11 30.11,31.96 30.42,31.65 30.87,31.65 30.87,31.8 30.42,31.8 30.26,31.96 30.42,32.11 30.11,32.41 30.11,32.57 30.26,32.57 30.26,32.41 30.11,32.26 30.42,31.96 30.87,31.96 31.03,31.8 31.03,30.28 31.48,30.28 31.79,29.97 31.64,29.82 31.48,29.97 31.33,29.82 31.64,29.52 31.79,29.67 31.79,29.82 31.48,30.13 31.33,30.13 31.18,29.97 30.87,29.97 30.87,30.13 31.18,30.13 31.94,29.36 31.94,28.6 31.79,28.45 31.79,28.3 31.94,28.15 31.94,27.69 31.64,27.38 30.26,27.38 30.11,27.54 30.26,27.69 31.64,27.69 31.64,27.99 31.79,27.99 31.79,27.69 31.64,27.54 30.26,27.54 29.96,27.23 29.95,27.24 v29.67,27.24
  Top 0.152: v33.01,17.48 32.7,17.17 32.55,17.33 32.4,17.17 32.09,17.17 31.79,17.48 31.79,17.78 31.64,17.78 31.64,17.63 31.48,17.63 31.03,17.17 30.72,17.48 30.72,17.78 30.87,17.78 30.87,17.48 31.33,17.02 C4.2 | C10.2 11.52,28.1 C15.2 | EPD_C7.1 13.24,16.26 EPD_C6.1 13.64,15.86 14.77,15.86 14.77,14.76 14.41,14.39 EPD_C8.1 | 14.06,13.79 13.74,13.47 EPD_C10.1 13.76,13.27 EPD_C11.1 EPD_C12.1 | C33.2 43.31,24.76 C25.2 | C24.1 C23.1 | U3.9 19.66,6.01 U3.6 | J2.3 37.84,10.28 37.84,7.32 | C8.2 24.25,22.8 v24.29,22.84 | C31.1 24.82,9.57 24.82,9.86 | 24.82,9.86 24.86,9.89 25.64,9.89 C30.1 | v28.99,27.23 28.99,27.19 28.97,27.16
  Bottom 0.152: v32.55,24.03 32.55,17.93 v33.01,17.48 | v23.98,8.82 23.35,9.46 v22.13,9.46 22.13,8.41 21.3,7.58 21.25,7.63 v21.14,7.63 | v29.11,4.05 31.5,4.05 | 31.5,4.05 v31.92,4.47 | 31.5,4.05 37.01,4.05 | 37.01,4.05 v37.36,3.7 | 37.01,4.05 38.7,4.05 v41.34,6.69 | v24.29,22.84 v24.29,25.16 | v24.29,25.16 v24.3,25.17 | v26.8,25.46 26.5,25.16 v24.29,25.16 | v5.99,3.55 8.15,3.55 v8.4,3.3 | v23.61,6.91 21.35,6.91 | 21.35,6.91 21.29,6.91 21.28,6.91 | v21.02,6.96 21.3,6.96 21.35,6.91 | v29.32,21.02 30.53,21.02 v30.94,20.61 | v28.99,27.23 29.67,27.23 v29.67,27.24
  pour Top: 48.03,-2.56 48.03,36.61 -4.64,36.61 -4.64,-1.43 -3.43,-2.64 47.95,-2.64
HAPTIC_EN  (via drill 0.35)
  Top 0.152: v23.07,13.96 23.53,13.96 23.7,14.14 23.71,14.12 23.86,14.12 U1.P$U1 | v17.35,18.34 v17.34,18.35 IC2.A1
  Bottom 0.152: v17.35,18.34 19.05,18.34 23.07,14.33 v23.07,13.96
IMU_INT1
  Top 0.152: 23.96,15.08 U1.P$N1 23.69,14.89 21.27,14.89 19.44,13.06 19.44,12.75 IC3.5
IMU_INT2
  Top 0.152: IC3.6 19.31,12.4 19.31,12.28 19.4,12.19 19.53,12.19 19.82,12.48 19.82,12.99 20.88,14.06 22.32,14.06 22.49,13.89 22.49,13.6 22.62,13.47 23.32,13.47 23.75,13.89 24.5,13.89 24.63,14.02 24.63,14.71 U1.P$P2
LX1  (via drill 0.35)
  Top 0.152: 42.3,28.3 42,28.3 IC9.B2 | 42.3,28.3 42.61,28.3 42.91,28.6 42.91,29.06 v42.46,29.52 | v40.47,24.79 41.54,23.73 41.54,22.81 L7.1 | 42.3,28.3 IC9.B3
  Bottom 0.152: v42.46,29.52 42.46,26.62 40.63,24.79 v40.47,24.79
LX2
  Top 0.152: 42.3,27.54 42,27.54 IC9.D2 | 42.3,27.54 42.46,27.54 43.67,26.32 44.13,26.32 44.74,25.71 44.74,24.79 43.67,23.73 43.67,22.81 L7.2 | 42.3,27.54 IC9.D3
MOSI  (via drill 0.35)
  Top 0.152: U1.P$B13 27.25,18.1 v27.25,18.06 | v20.99,21.49 20.99,20.94 20.46,20.42 20.46,20.12 v20.27,19.93 | J1.14 11.38,16.75 v11.39,16.74
  Bottom 0.152: v27.25,18.06 26.52,17.33 26.5,17.33 24.86,15.69 24.86,15.48 22.94,15.48 20.09,18.33 20.09,19.63 20.27,19.81 v20.27,19.93 | v20.99,21.49 20.87,21.49 19.47,20.09 12.37,20.09 11.12,18.83 11.12,17.03 11.18,16.97 11.18,16.95 v11.39,16.74
N$1
  Top 0.152: IC3.1 20.05,11.08 20.36,11.08 20.97,11.69 22.03,11.69 22.19,11.53 22.19,11.23 R3.2
N$2
  Top 0.152: IC1.D1 4.51,6.66 4.2,6.35 4.2,6.2 5.12,5.29 5.57,5.29 5.73,5.13 5.73,4.83 R9.2
N$3
  Top 0.152: IC9.D1 41.54,27.54 41.39,27.54 41.08,27.23 40.47,27.23 40.17,27.54 40.02,27.38 39.86,27.38 R4.2
N$4  (1 unrouted)
N$5
  Top 0.152: R_TYPE_SEL.2 17,32.87 18.22,32.87 18.38,32.72 SJ1.2 18.38,32.57 17.92,32.11 17,32.11 R1_EP_DR.1
N$6  (via drill 0.35)
  Top 0.152: C20.1 v24.71,11.22 | v23.19,11.84 22.76,12.27 22.76,12.72 22.92,12.88 23.52,12.88 23.87,13.23 24.05,13.23 24.14,13.14 24.58,13.14 24.59,13.15 24.65,13.09 24.65,12.73 24.74,12.64 U1.P$AC5
  Bottom 0.152: v24.71,11.22 23.57,11.22 23.19,11.6 v23.19,11.84
N$7
  Top 0.152: U1.P$B3 24.78,18.09 24.32,18.54 24.32,19.61 24.02,19.92 23.41,19.92 23.1,19.61 23.1,19.15 22.64,18.7 22.49,18.85 L2.1
N$8
  Top 0.152: L2.2 21.58,19 21.58,19.92 L3.1
N$9
  Top 0.152: 9.08,33.17 10.45,33.17 11.52,32.11 12.28,32.11 Q3.3 12.43,32.11 15.48,32.11 16.24,31.35 16.24,28.76 L5.1 | 9.08,33.17 8.47,33.17 C2-EP-DR.2 | 9.08,33.17 9.08,32.11 6.49,29.52 6.49,27.54 D5.2
N$10
  Top 0.152: C2-EP-DR.1 7.86,33.17 7.4,33.17 6.64,32.41 6.64,31.19 6.49,31.04 D2.1 6.34,31.04 5.73,31.04 4.97,30.28 3.75,30.28 D4.2
N$11  (via drill 0.35)
  Top 0.152: v13.04,25.4 13.35,25.4 13.5,25.25 13.5,24.79 EPD_C2.2 | v10.45,21.59 10.6,21.59 10.76,21.74 J1.4
  Bottom 0.152: v13.04,25.4 13.04,24.18 v10.45,21.59
N$12
  Top 0.152: EPD_C1.2 13.35,23.42 12.89,23.42 12.59,23.12 12.59,21.9 11.98,21.29 11.52,21.29 J1.5
N$13
  Top 0.152: R2_USB.1 24.78,26.93 24.78,27.38 24.93,27.54 24.93,28.15 J4.B5
N$14
  Top 0.152: IC2.A2 17.92,18.39 17.92,18.7 18.07,18.85 18.07,19.31 17.16,20.22 17,20.22 C32.2
N$15
  Top 0.152: EPD_C6.2 13.8,16.26 14.11,16.26 14.26,16.41 14.26,16.72 13.96,17.02 12.74,17.02 12.28,16.56 12.28,15.19 11.82,14.73 11.52,14.73 J1.18
N$16
  Top 0.152: EPD_C7.2 13.8,15.34 13.8,15.19 13.5,14.89 12.89,14.89 12.74,15.04 11.98,14.28 11.52,14.28 J1.19
N$17
  Top 0.152: 13.8,14.34 EPD_C8.2 13.88,14.2 13.5,13.82 12.89,13.82 12.74,13.67 11.82,13.67 11.67,13.82 11.52,13.82 J1.20
N$19
  Top 0.152: U1.P$A18 28.43,18.7 28.43,19 28.28,19.15 28.28,19.46 28.43,19.46 C13.1
N$20
  Top 0.152: EPD_C10.2 13.19,13.36 12.59,13.36 11.98,12.75 11.52,12.75 J1.22
N$22
  Top 0.152: U1.P$N24 30.42,15.04 30.72,15.04 31.03,14.73 C9.1
N$23
  Top 0.152: L1.1 32.09,15.65 31.64,15.65 31.48,15.8 31.33,15.8 C3.1 30.59,16.45 30.07,16.45 U1.P$H23
N$24
  Top 0.152: X1.3 37.27,22.05 37.73,22.51 37.73,22.81 37.58,22.96 C2.1 37.66,23.17 37.66,24.47 37.5,24.63 35.93,24.63 30.75,19.45 30.75,18.88 30.6,18.73 30.12,18.73 U1.P$A23
N$25
  Top 0.152: U1.P$B24 30.57,18.09 31.18,18.09 C1.1 31.33,18.24 31.64,18.24 33.92,20.53 35.6,20.53 35.75,20.68 X1.1
N$26
  Top 0.152: EPD_C12.2 13.19,11.38 12.28,11.38 11.98,11.69 11.52,11.69 J1.24
N$28
  Top 0.152: R1_USB.2 27.83,27.08 27.83,27.38 27.98,27.54 27.98,28.15 J4.A5
OUT+
  Top 0.152: IC2.A3 18.38,18.39 18.38,18.54 18.68,18.85 18.68,19.76 18.53,19.92 18.53,20.83 TP_OP.TP
OUT-
  Top 0.152: IC2.C3 18.38,17.33 18.68,17.02 19.14,17.48 19.14,19 19.75,19.61 20.66,19.61 21.12,19.15 21.12,18.54 20.51,17.93 20.97,17.48 20.97,17.02 TP_ON.TP
P0.00/XL1  (via drill 0.35)  (1 unrouted)
  Top 0.152: X2.1 33.31,32.72 33.31,31.96 33.92,31.35 33.92,31.04 33.77,30.89 33.31,30.89 C17.2 33.7,30.49 33.7,27.42 33.6,27.33 v33.6,27.14 | v32.41,26.61 31.52,25.73 31.52,25.26 v29.3,23.03 | v27.82,19.26 27.31,18.75 27.19,18.75 27.13,18.81 26.82,18.81 26.8,18.79 26.24,18.79 26.23,18.8 26.18,18.75 26.18,18.59 26.23,18.54 | U1.P$D2 v24.46,17.38
  Bottom 0.152: v33.6,27.14 33.08,26.61 v32.41,26.61 | v27.82,19.26 27.84,19.28 27.86,19.28 27.86,20.86 29.3,22.29 v29.3,23.03 | v26.03,17.82 25.6,17.39 24.99,17.39 | 24.99,17.39 24.81,17.39 | 24.99,17.39 24.98,17.38 v24.46,17.38
P0.01/XL2  (via drill 0.35)
  Top 0.152: v22.34,17.93 22.49,17.93 22.95,17.48 23.56,17.48 23.86,17.17 24.17,17.17 24.47,16.87 U1.P$F2 | v35.29,31.35 35.9,31.96 35.9,32.72 X2.2 35.9,32.87 36.66,33.63 37.12,33.63 C18.2
  Bottom 0.152: v22.34,17.93 22.64,18.24 22.64,18.39 22.95,18.7 24.62,18.7 25.08,18.24 31.33,18.24 31.76,18.67 31.76,26.22 | 31.76,26.22 31.76,26.74 35.29,30.28 v35.29,31.35 | 31.76,26.22
P0.13  (via drill 0.35)
  Top 0.152: SW_UP.2 10.45,4.83 10.6,4.98 10.6,6.05 R5.1 11.35,6.81 v12.15,6.81 | U1.P$AD8 26,12.14 26,11.53 26.15,11.38 26.15,11.08 C30.2 26.42,11.01 27.1,10.33 27.1,10.21 27,10.11 26.54,10.11 26.44,10.01 v26.44,8.14
  Bottom 0.152: v12.15,6.81 13.17,5.8 26.53,5.8 26.8,6.07 26.8,6.32 26.56,6.56 26.45,6.56 26.26,6.75 26.26,7.96 v26.44,8.14
P0.14  (via drill 0.35)
  Top 0.152: C31.2 25.39,9.55 26,9.55 R8.1 | C31.2 25.39,9.4 25.39,9.1 21.58,5.29 21.58,4.98 21.73,4.83 SW_ENT.2 | C31.2 v25.28,9.5 | U1.P$AC9 v26.16,12.6
  Bottom 0.152: v25.28,9.5 26.57,10.79 26.95,10.79 27.48,11.32 27.48,11.66 27.25,11.89 | 27.24,11.89 27.25,11.89 | 27.25,11.89 26.53,12.62 26.18,12.62 v26.16,12.6
P1.01  (via drill 0.35)
  Top 0.152: v32.09,12.3 31.79,12.6 31.48,12.6 R_PWR_EPD.1 30.91,12.58 30.67,12.81 30.07,12.81 29.94,12.94 U1.P$Y23 | v20.21,21.29 20.81,21.9 20.81,22.05 20.66,22.2 Q1.1
  Bottom 0.152: v32.09,12.3 32.09,12.75 33.92,14.58 33.92,15.95 43.98,26.01 43.98,30.89 43.52,31.35 42.61,31.35 40.02,28.76 40.02,28.3 39.71,27.99 39.1,27.99 35.9,31.19 35.9,31.65 35.6,31.96 34.99,31.96 31.94,28.91 31.94,27.38 28.59,24.03 28.59,22.2 28.28,21.9 22.49,21.9 16.24,28.15 12.43,28.15 12.13,27.84 12.13,27.23 18.07,21.29 v20.21,21.29
P1.02  (via drill 0.35)
  Top 0.152: U1.P$W24 30.42,13.67 31.64,13.67 R7.1 31.79,13.82 31.79,13.97 32.24,14.43 v32.4,14.43 | 31.79,5.29 31.48,4.98 C29.2 | 31.79,5.29 32.24,4.83 32.55,4.83 SW_DN.2 | v31.48,5.74 31.79,5.44 31.79,5.29
  Bottom 0.152: v32.4,14.43 30.42,12.45 30.26,12.45 29.96,12.14 29.96,7.27 v31.48,5.74
PMIC_INT  (via drill 0.35)
  Top 0.152: IC1.A1 v4.62,7.77 v4.62,7.76 | v21.79,12.68 21.7,12.77 21.7,13.34 21.71,13.35 v21.71,13.46 | v22.11,14.47 22.74,14.47 22.88,14.6 23.44,14.6 23.65,14.4 U1.P$T2
  Bottom 0.152: v4.62,7.76 5.74,8.88 17.95,8.88 17.96,8.87 18.17,8.87 21.59,12.29 21.59,12.49 v21.79,12.68 | v21.71,13.46 21.68,13.48 21.68,14.22 21.63,14.27 20.82,14.27 20.11,14.98 20.11,15.35 20.25,15.49 20.41,15.49 21.27,14.63 21.95,14.63 v22.11,14.47
PREVGH  (via drill 0.35)
  Top 0.152: 11.06,26.93 13.04,26.93 13.35,27.23 13.35,29.36 EPD_C9.2 | 11.06,26.93 10.45,27.54 9.99,27.54 D5.1 | v10.45,13.52 10.76,13.21 11.37,13.21 J1.21 | 11.06,26.93 v11.06,26.77
  Bottom 0.152: v10.45,13.52 10.45,20.68 9.84,21.29 9.84,25.55 v11.06,26.77
PREVGL  (via drill 0.35)
  Top 0.152: EPD_C11.2 13.19,12.3 11.52,12.3 J1.23 11.37,12.3 10.76,12.3 10.3,12.75 v9.84,12.75 | v10.76,28.45 9.84,29.36 9.84,30.89 D2.2
  Bottom 0.152: v10.76,28.45 10.76,27.38 9.54,26.16 9.54,13.06 v9.84,12.75
RESE  (via drill 0.35)
  Top 0.152: 15.33,32.72 15.94,32.11 16.4,32.11 R1_EP_DR.2 | 15.33,32.72 14.41,32.72 Q3.2 | v8.62,25.71 9.84,24.49 9.84,23.12 10.76,22.2 11.37,22.2 J1.3 | 15.33,32.72 v15.48,32.72
  Bottom 0.152: v8.62,25.71 8.62,27.69 13.65,32.72 v15.48,32.72
RESET  (via drill 0.35)
  Top 0.152: 41.98,7.46 TP_RESET.TP 40.33,6.59 32.64,6.59 31.27,7.96 31.27,8.64 | 41.98,7.46 41.98,7.47 41.97,7.49 | v41.99,9.22 41.99,7.47 41.98,7.46 | v42.17,12.01 40.57,12.01 J2.6 | 31.27,8.64 31.27,8.66 | v31.07,8.84 31.27,8.64 | v30.27,11.57 30.25,11.6 30.25,12.17 29.95,12.47 29.68,12.47 29.61,12.4 27.41,12.4 U1.P$AC13
  Bottom 0.152: v41.99,9.22 41.99,9.29 42.69,9.99 42.69,12.33 42.49,12.33 v42.17,12.01 | v31.07,8.84 30.27,9.64 30.27,11.37 v30.27,11.57
RF
  Top 0.152: C4.1 31.33,16.56 32.09,16.56 L1.2 32.24,16.72 32.4,16.72 32.55,16.56 33.01,16.56 33.62,17.17 33.62,17.78 33.33,18.07 33.92,18.66 C22.1 35.99,18.71 36.32,18.37 40.65,18.37 ANT1.1
SCK  (via drill 0.35)
  Top 0.152: J1.13 11.33,17.21 v10.96,17.21 | v16.57,21.99 17.24,22.66 17.24,22.93 17.63,23.33 v17.68,23.33 | v21.62,21.75 21.62,21.46 21.35,21.2 21.35,20.86 20.79,20.3 | 20.79,20.1 20.79,20.3 | 20.79,20.3 20.78,20.29 v20.78,19.89 | v26.43,17.95 26.43,18.07 U1.P$A12
  Bottom 0.152: v10.96,17.21 10.79,17.37 10.79,18.96 12.25,20.42 14.47,20.42 16.05,21.99 v16.57,21.99 | v17.68,23.33 18.97,22.04 21.33,22.04 v21.62,21.75 | v20.78,19.89 20.78,19.55 20.4,19.17 20.4,18.46 23.05,15.8 24.51,15.8 25.5,16.79 25.5,16.86 26.43,17.79 26.45,17.82 26.45,17.93 v26.43,17.95
SCL  (via drill 0.35)
  Top 0.152: 39.26,27.38 39.41,27.23 39.41,26.93 39.26,26.77 R17.2 | 4.05,7.27 3.75,6.96 3.75,5.59 3.59,5.44 4.05,4.98 4.05,4.37 TP_SCL.TP | 4.05,7.27 4.2,7.42 4.51,7.42 IC1.B1 | v16.85,16.72 17.16,17.02 17.16,17.17 17.31,17.33 IC2.C1 | 4.05,7.27 v3.9,7.42 | v19.29,11.99 19.29,11.84 19.6,11.53 19.6,11.23 IC3.12 | 39.26,27.38 38.8,27.38 38.65,27.54 38.65,27.84 v39.41,28.6 | 39.26,27.38 R4.1 | v19.9,4.83 19.9,5.74 U3.7 | U1.P$M2 24.43,15.37 23.65,15.37 23.47,15.19 21.12,15.19 20.04,14.11 19.78,14.11 v19.76,14.08
  Bottom 0.152: 9.23,11.08 7.25,9.1 5.57,9.1 v3.9,7.42 3.9,7.27 6.34,4.83 v19.9,4.83 | 9.23,11.08 14.87,16.72 v16.85,16.72 19.29,14.28 19.29,14.05 | 19.29,14.05 v19.29,11.99 | v39.41,28.6 35.75,32.26 31.94,32.26 31.33,31.65 17.46,31.65 15.79,33.33 13.8,33.33 8.01,27.54 8.01,25.1 8.62,24.49 8.62,11.69 9.23,11.08 | 19.29,14.05 19.33,14.08 v19.76,14.08
SDA  (via drill 0.35)
  Top 0.152: 22.19,7.27 20.81,5.9 20.51,5.9 U3.8 | 22.19,7.27 22.95,8.03 22.95,11.38 22.34,11.99 20.81,11.99 20.51,11.69 20.05,11.69 IC3.2 | 19.9,15.95 19.44,16.41 19.44,17.9 | 19.9,15.95 20.36,15.5 23.56,15.5 23.71,15.65 23.86,15.65 U1.P$L1 | 19.44,17.9 19.44,18.85 19.6,19 20.05,19 R2.1 | R18.2 16.55,15.5 16.09,15.5 v15.79,15.19 14.41,13.82 14.41,10.92 11.06,7.57 9.08,7.57 8.62,7.11 8.01,7.11 TP_SDA.TP 7.66,6.81 5.54,6.81 5.16,7.19 4.75,7.19 IC1.C1 | v18.22,14.28 19.9,15.95 | 22.19,7.27 19.8,9.65 v18.07,9.65 | IC2.B2 17.8,17.83 v17.78,17.83 | v19.46,17.89 19.45,17.89 19.44,17.9
  Bottom 0.152: 17.77,14.28 16.7,14.28 v15.79,15.19 | 17.77,14.28 v18.22,14.28 | v18.07,9.65 17.77,9.96 17.77,14.28 | v19.46,17.89 17.85,17.89 v17.78,17.83
SWDCLK  (via drill 0.35)
  Top 0.152: v30.57,11.84 30.57,12.14 30.42,12.3 30.42,12.6 U1.P$AC24 | v38.19,5.74 39.26,4.68 TP_SWDCLK.TP | J2.4 | J2.4 v38.83,12.51
  Bottom 0.152: v30.57,11.84 30.57,11.23 32.28,9.52 | 32.28,9.52 36.05,5.74 v38.19,5.74 | 32.28,9.52 34.39,11.64 34.39,15.66 34.92,16.19 36.98,16.19 37.74,15.42 37.74,13.13 38.36,12.51 v38.83,12.51
SWDIO
  Top 0.152: U1.P$AA24 30.42,13.06 30.72,13.06 30.87,13.21 31.18,13.21 31.33,13.06 32.55,13.06 33.77,14.28 33.77,15.5 35.46,17.19 TP_SWDIO.TP J2.2 | J2.2
SWO
  Top 0.152: U1.P$AD22 29.35,12.14 29.35,11.84 29.04,11.53 28.89,11.53 28.59,11.23 28.59,11.08 29.35,10.31 TP_SWO.TP
VBAT  (via drill 0.35)
  Top 0.152: TP_VBAT.TP 6.95,2.24 6.95,3.3 6.79,3.46 6.79,3.61 7.1,3.91 C37.2 7.1,4.07 7.1,4.98 | U3.2 19.9,7.88 19.44,7.88 U3.3 19.29,7.88 19.29,8.33 19.44,8.49 v19.44,8.79 | 7.1,4.98 v5.73,6.35 5.12,6.96 4.97,6.96 IC1.C2 | 7.1,4.98 C27.2
  Bottom 0.152: v19.44,8.79 18.99,8.79 18.07,7.88 5.42,7.88 5.12,7.57 5.12,6.96 v5.73,6.35
VBUS  (via drill 0.35)
  Top 0.152: 30.57,26.93 30.42,26.77 30.26,26.93 30.11,26.77 29.5,26.77 C38.2 29.39,27.91 J4.A4_B9 29.1,28.81 28.95,28.96 28.46,28.96 28.39,28.89 27.63,28.89 27,29.52 26.13,29.52 26.12,29.51 25.87,29.51 25.55,29.19 25.55,29.01 24.76,29.01 24.3,28.55 J4.A9_B4 | 30.57,26.93 30.72,27.08 30.87,27.08 31.18,26.77 31.18,25.71 v27.98,22.51 27.83,22.35 27.06,22.35 26.76,22.05 26.76,21.29 D3.5 | 30.57,26.93 C42.1 | 5.27,8.18 4.97,7.88 IC1.A2 | 5.27,8.18 5.12,8.33 3.75,8.33 3.14,7.72 | 3.14,7.72 2.68,7.72 2.68,7.88 C21.1 | v23.86,12.45 24.17,12.14 24.47,12.14 U1.P$AD2 | 5.27,8.18 6.36,8.18 v6.55,8.38 7.6,8.38 9.84,10.62 9.84,11.38 v9.23,11.99 | 3.14,7.72 3.29,7.57 3.29,7.11 3.44,6.96 3.44,6.5 3.29,6.35 2.98,6.35 C43.1
  Bottom 0.152: v23.86,12.45 22.19,12.45 18.12,8.38 v6.55,8.38 | v27.98,22.51 22.34,22.51 15.79,29.06 10.45,29.06 9.23,27.84 v9.23,11.99
VREG  (via drill 0.35)
  Top 0.152: 41.54,28.76 41.85,28.76 IC9.A2 42,28.76 IC9.A3 | 41.54,28.76 41.24,29.06 41.24,29.21 42.46,30.43 42.46,30.58 C39.1 42.46,30.74 42.76,30.74 v43.07,30.43 | 41.54,28.76 IC9.A1 | v5.73,7.27 5.42,7.27 5.27,7.42 4.97,7.42 IC1.B2 | C23.2 39.26,20.98 38.65,20.98 C24.2 38.65,21.14 38.65,21.44 v38.34,21.74 38.34,22.2 38.8,22.66 38.8,22.81 39.26,23.27 TP_VREG.TP
  Bottom 0.152: v5.73,7.27 23.86,7.27 35.1,18.5 v38.34,21.74 43.07,26.47 v43.07,30.43